# EAGLE board npa201_LPS22HB_together (EAGLE 8.2.2)
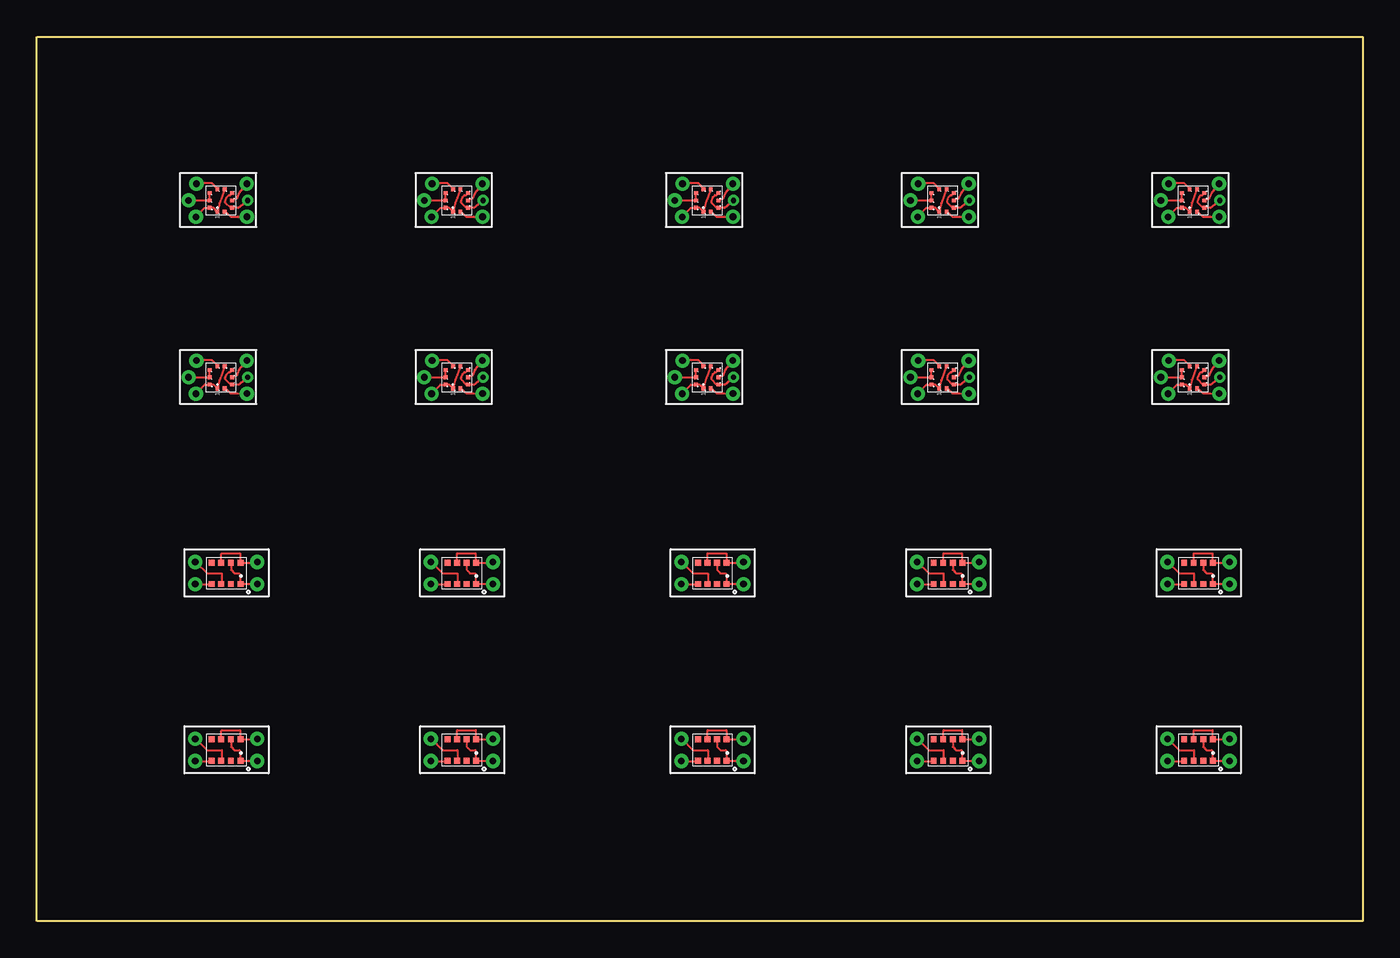
[diagram p0: board, top side]
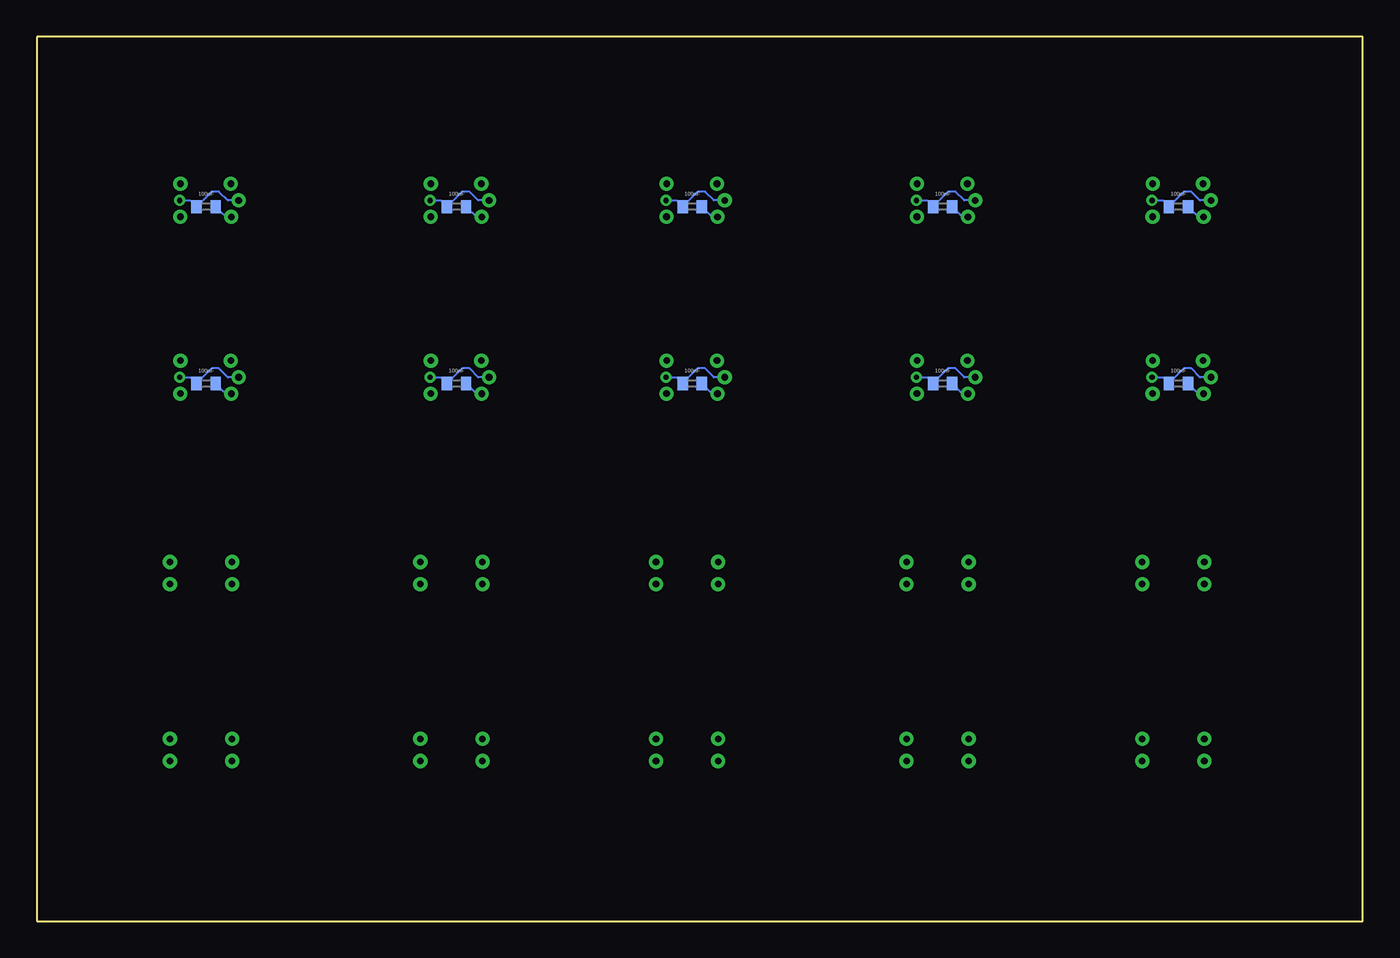
[diagram p1: board, bottom side, seen from below]

Size 90 x 60 mm. Coordinates in mm from the lower left corner, seen from the top.
Outline: 0,0 0,60 90,60 90,0 0,0
Copper layers (1*16): Top 0.035mm / dielectric 1.5mm / Bottom 0.035mm
Design rules "default *": minimum track width 6mil, minimum drill 0.35mm, track to track 6mil, track to pad 6mil, pad to pad 6mil, via to via 6mil, smd to smd 6mil, copper to edge 40mil, drill to drill 6mil, minimum pad ring 10mil, minimum via ring 8mil, stop-mask expansion 4mil, vias tented up to drill 0mil, thermal gap 10mil

## Footprints (pad centres in the part's own frame; a part is rotated, then mirrored left to right if it is on the bottom)
C0402 = smd 0.7 x 0.9: 1 -0.65,0; 2 0.65,0
AMPHENOL_NPA201 = smd 0.4 x 0.4: P$1 0.975,-0.725; P$2 0.325,-0.725; P$3 -0.325,-0.725; P$4 -0.975,-0.725; P$5 -0.975,0.725; P$6 -0.325,0.725; P$7 0.325,0.725; P$8 0.975,0.725
WIREPAD_0,8/0,45 = drill 0.45 pad 0.71: P$1 0,0
LPS22HB_HLGA = smd 0.275 x 0.25: P$1 0.762,-0.25; P$2 0.762,0.25; P$6 -0.762,0.25; P$7 -0.762,-0.25 | smd 0.25 x 0.275: P$3 0.5,0.762; P$4 0,0.762; P$5 -0.5,0.762; P$8 -0.5,-0.762; P$9 0,-0.762; P$10 0.5,-0.762

## Placement (x,y rotation side)
C1  100nF  [C0402]  28.51,36.48 180 bottom
C2  100nF  [C0402]  12.51,36.48 180 bottom
C3  100nF  [C0402]  12.51,48.48 180 bottom
C4  100nF  [C0402]  28.51,48.48 180 bottom
C5  100nF  [C0402]  45.51,36.48 180 bottom
C6  100nF  [C0402]  61.51,36.48 180 bottom
C7  100nF  [C0402]  45.51,48.48 180 bottom
C8  100nF  [C0402]  61.51,48.48 180 bottom
C9  100nF  [C0402]  78.51,36.48 180 bottom
C10  100nF  [C0402]  78.51,48.48 180 bottom
U$1  AMPHENOL_NPA201  [AMPHENOL_NPA201]  12.85,11.6 0 top
U$2  WIREPAD_0,8/0,45  [WIREPAD_0,8/0,45]  10.75,12.36 0 top
U$3  WIREPAD_0,8/0,45  [WIREPAD_0,8/0,45]  10.75,10.86 0 top
U$4  WIREPAD_0,8/0,45  [WIREPAD_0,8/0,45]  14.97,12.36 0 top
U$5  WIREPAD_0,8/0,45  [WIREPAD_0,8/0,45]  14.97,10.86 0 top
U$6  WIREPAD_0,8/0,45  [WIREPAD_0,8/0,45]  10.75,24.36 0 top
U$7  WIREPAD_0,8/0,45  [WIREPAD_0,8/0,45]  10.75,22.86 0 top
U$8  WIREPAD_0,8/0,45  [WIREPAD_0,8/0,45]  14.97,24.36 0 top
U$9  WIREPAD_0,8/0,45  [WIREPAD_0,8/0,45]  14.97,22.86 0 top
U$10  AMPHENOL_NPA201  [AMPHENOL_NPA201]  12.85,23.6 0 top
U$11  WIREPAD_0,8/0,45  [WIREPAD_0,8/0,45]  26.75,12.36 0 top
U$12  WIREPAD_0,8/0,45  [WIREPAD_0,8/0,45]  26.75,10.86 0 top
U$13  WIREPAD_0,8/0,45  [WIREPAD_0,8/0,45]  30.97,12.36 0 top
U$14  WIREPAD_0,8/0,45  [WIREPAD_0,8/0,45]  30.97,10.86 0 top
U$15  AMPHENOL_NPA201  [AMPHENOL_NPA201]  28.85,11.6 0 top
U$16  WIREPAD_0,8/0,45  [WIREPAD_0,8/0,45]  26.75,24.36 0 top
U$17  WIREPAD_0,8/0,45  [WIREPAD_0,8/0,45]  26.75,22.86 0 top
U$18  WIREPAD_0,8/0,45  [WIREPAD_0,8/0,45]  30.97,24.36 0 top
U$19  WIREPAD_0,8/0,45  [WIREPAD_0,8/0,45]  30.97,22.86 0 top
U$20  AMPHENOL_NPA201  [AMPHENOL_NPA201]  28.85,23.6 0 top
U$21  WIREPAD_0,8/0,45  [WIREPAD_0,8/0,45]  43.75,12.36 0 top
U$22  WIREPAD_0,8/0,45  [WIREPAD_0,8/0,45]  43.75,10.86 0 top
U$23  WIREPAD_0,8/0,45  [WIREPAD_0,8/0,45]  47.97,12.36 0 top
U$24  WIREPAD_0,8/0,45  [WIREPAD_0,8/0,45]  47.97,10.86 0 top
U$25  AMPHENOL_NPA201  [AMPHENOL_NPA201]  45.85,11.6 0 top
U$26  WIREPAD_0,8/0,45  [WIREPAD_0,8/0,45]  43.75,24.36 0 top
U$27  WIREPAD_0,8/0,45  [WIREPAD_0,8/0,45]  43.75,22.86 0 top
U$28  WIREPAD_0,8/0,45  [WIREPAD_0,8/0,45]  47.97,24.36 0 top
U$29  WIREPAD_0,8/0,45  [WIREPAD_0,8/0,45]  47.97,22.86 0 top
U$30  AMPHENOL_NPA201  [AMPHENOL_NPA201]  45.85,23.6 0 top
U$31  WIREPAD_0,8/0,45  [WIREPAD_0,8/0,45]  59.75,12.36 0 top
U$32  WIREPAD_0,8/0,45  [WIREPAD_0,8/0,45]  59.75,10.86 0 top
U$33  WIREPAD_0,8/0,45  [WIREPAD_0,8/0,45]  63.97,12.36 0 top
U$34  WIREPAD_0,8/0,45  [WIREPAD_0,8/0,45]  63.97,10.86 0 top
U$35  AMPHENOL_NPA201  [AMPHENOL_NPA201]  61.85,11.6 0 top
U$36  WIREPAD_0,8/0,45  [WIREPAD_0,8/0,45]  59.75,24.36 0 top
U$37  WIREPAD_0,8/0,45  [WIREPAD_0,8/0,45]  59.75,22.86 0 top
U$38  WIREPAD_0,8/0,45  [WIREPAD_0,8/0,45]  63.97,24.36 0 top
U$39  WIREPAD_0,8/0,45  [WIREPAD_0,8/0,45]  63.97,22.86 0 top
U$40  AMPHENOL_NPA201  [AMPHENOL_NPA201]  61.85,23.6 0 top
U$41  WIREPAD_0,8/0,45  [WIREPAD_0,8/0,45]  76.75,12.36 0 top
U$42  WIREPAD_0,8/0,45  [WIREPAD_0,8/0,45]  76.75,10.86 0 top
U$43  WIREPAD_0,8/0,45  [WIREPAD_0,8/0,45]  80.97,12.36 0 top
U$44  WIREPAD_0,8/0,45  [WIREPAD_0,8/0,45]  80.97,10.86 0 top
U$45  AMPHENOL_NPA201  [AMPHENOL_NPA201]  78.85,11.6 0 top
U$46  WIREPAD_0,8/0,45  [WIREPAD_0,8/0,45]  76.75,24.36 0 top
U$47  WIREPAD_0,8/0,45  [WIREPAD_0,8/0,45]  76.75,22.86 0 top
U$48  WIREPAD_0,8/0,45  [WIREPAD_0,8/0,45]  80.97,24.36 0 top
U$49  WIREPAD_0,8/0,45  [WIREPAD_0,8/0,45]  80.97,22.86 0 top
U$50  AMPHENOL_NPA201  [AMPHENOL_NPA201]  78.85,23.6 0 top
U$51  WIREPAD_0,8/0,45  [WIREPAD_0,8/0,45]  14.26,35.79 90 top
U$52  WIREPAD_0,8/0,45  [WIREPAD_0,8/0,45]  14.25,38.03 90 top
U$53  WIREPAD_0,8/0,45  [WIREPAD_0,8/0,45]  10.83,38.03 90 top
U$54  WIREPAD_0,8/0,45  [WIREPAD_0,8/0,45]  10.3,36.9 90 top
U$55  WIREPAD_0,8/0,45  [WIREPAD_0,8/0,45]  10.8,35.78 90 top
U$56  LPS22HB_HLGA  [LPS22HB_HLGA]  12.5,36.9 270 top
U$57  WIREPAD_0,8/0,45  [WIREPAD_0,8/0,45]  30.26,35.79 90 top
U$58  WIREPAD_0,8/0,45  [WIREPAD_0,8/0,45]  30.25,38.03 90 top
U$59  WIREPAD_0,8/0,45  [WIREPAD_0,8/0,45]  26.83,38.03 90 top
U$60  WIREPAD_0,8/0,45  [WIREPAD_0,8/0,45]  26.3,36.9 90 top
U$61  WIREPAD_0,8/0,45  [WIREPAD_0,8/0,45]  26.8,35.78 90 top
U$62  LPS22HB_HLGA  [LPS22HB_HLGA]  28.5,36.9 270 top
U$63  WIREPAD_0,8/0,45  [WIREPAD_0,8/0,45]  14.26,47.79 90 top
U$64  WIREPAD_0,8/0,45  [WIREPAD_0,8/0,45]  14.25,50.03 90 top
U$65  WIREPAD_0,8/0,45  [WIREPAD_0,8/0,45]  10.83,50.03 90 top
U$66  WIREPAD_0,8/0,45  [WIREPAD_0,8/0,45]  10.3,48.9 90 top
U$67  WIREPAD_0,8/0,45  [WIREPAD_0,8/0,45]  10.8,47.78 90 top
U$68  LPS22HB_HLGA  [LPS22HB_HLGA]  12.5,48.9 270 top
U$69  WIREPAD_0,8/0,45  [WIREPAD_0,8/0,45]  30.26,47.79 90 top
U$70  WIREPAD_0,8/0,45  [WIREPAD_0,8/0,45]  30.25,50.03 90 top
U$71  WIREPAD_0,8/0,45  [WIREPAD_0,8/0,45]  26.83,50.03 90 top
U$72  WIREPAD_0,8/0,45  [WIREPAD_0,8/0,45]  26.3,48.9 90 top
U$73  WIREPAD_0,8/0,45  [WIREPAD_0,8/0,45]  26.8,47.78 90 top
U$74  LPS22HB_HLGA  [LPS22HB_HLGA]  28.5,48.9 270 top
U$75  WIREPAD_0,8/0,45  [WIREPAD_0,8/0,45]  47.26,35.79 90 top
U$76  WIREPAD_0,8/0,45  [WIREPAD_0,8/0,45]  47.25,38.03 90 top
U$77  WIREPAD_0,8/0,45  [WIREPAD_0,8/0,45]  43.83,38.03 90 top
U$78  WIREPAD_0,8/0,45  [WIREPAD_0,8/0,45]  43.3,36.9 90 top
U$79  WIREPAD_0,8/0,45  [WIREPAD_0,8/0,45]  43.8,35.78 90 top
U$80  LPS22HB_HLGA  [LPS22HB_HLGA]  45.5,36.9 270 top
U$81  WIREPAD_0,8/0,45  [WIREPAD_0,8/0,45]  63.26,35.79 90 top
U$82  WIREPAD_0,8/0,45  [WIREPAD_0,8/0,45]  63.25,38.03 90 top
U$83  WIREPAD_0,8/0,45  [WIREPAD_0,8/0,45]  59.83,38.03 90 top
U$84  WIREPAD_0,8/0,45  [WIREPAD_0,8/0,45]  59.3,36.9 90 top
U$85  WIREPAD_0,8/0,45  [WIREPAD_0,8/0,45]  59.8,35.78 90 top
U$86  LPS22HB_HLGA  [LPS22HB_HLGA]  61.5,36.9 270 top
U$87  WIREPAD_0,8/0,45  [WIREPAD_0,8/0,45]  47.26,47.79 90 top
U$88  WIREPAD_0,8/0,45  [WIREPAD_0,8/0,45]  47.25,50.03 90 top
U$89  WIREPAD_0,8/0,45  [WIREPAD_0,8/0,45]  43.83,50.03 90 top
U$90  WIREPAD_0,8/0,45  [WIREPAD_0,8/0,45]  43.3,48.9 90 top
U$91  WIREPAD_0,8/0,45  [WIREPAD_0,8/0,45]  43.8,47.78 90 top
U$92  LPS22HB_HLGA  [LPS22HB_HLGA]  45.5,48.9 270 top
U$93  WIREPAD_0,8/0,45  [WIREPAD_0,8/0,45]  63.26,47.79 90 top
U$94  WIREPAD_0,8/0,45  [WIREPAD_0,8/0,45]  63.25,50.03 90 top
U$95  WIREPAD_0,8/0,45  [WIREPAD_0,8/0,45]  59.83,50.03 90 top
U$96  WIREPAD_0,8/0,45  [WIREPAD_0,8/0,45]  59.3,48.9 90 top
U$97  WIREPAD_0,8/0,45  [WIREPAD_0,8/0,45]  59.8,47.78 90 top
U$98  LPS22HB_HLGA  [LPS22HB_HLGA]  61.5,48.9 270 top
U$99  WIREPAD_0,8/0,45  [WIREPAD_0,8/0,45]  80.26,35.79 90 top
U$100  WIREPAD_0,8/0,45  [WIREPAD_0,8/0,45]  80.25,38.03 90 top
U$101  WIREPAD_0,8/0,45  [WIREPAD_0,8/0,45]  76.83,38.03 90 top
U$102  WIREPAD_0,8/0,45  [WIREPAD_0,8/0,45]  76.3,36.9 90 top
U$103  WIREPAD_0,8/0,45  [WIREPAD_0,8/0,45]  76.8,35.78 90 top
U$104  LPS22HB_HLGA  [LPS22HB_HLGA]  78.5,36.9 270 top
U$105  WIREPAD_0,8/0,45  [WIREPAD_0,8/0,45]  80.26,47.79 90 top
U$106  WIREPAD_0,8/0,45  [WIREPAD_0,8/0,45]  80.25,50.03 90 top
U$107  WIREPAD_0,8/0,45  [WIREPAD_0,8/0,45]  76.83,50.03 90 top
U$108  WIREPAD_0,8/0,45  [WIREPAD_0,8/0,45]  76.3,48.9 90 top
U$109  WIREPAD_0,8/0,45  [WIREPAD_0,8/0,45]  76.8,47.78 90 top
U$110  LPS22HB_HLGA  [LPS22HB_HLGA]  78.5,48.9 270 top

## Library data of the parts
C1-C10 = resistor
U$1 U$10 U$15 U$20 U$25 U$30 U$35 U$40 U$45 U$50 = Amphenol_NPA201
U$2-U$9 U$11-U$14 U$16-U$19 U$21-U$24 U$26-U$29 U$31-U$34 U$36-U$39 U$41-U$44 U$46-U$49 U$51-U$55 U$57-U$61 U$63-U$67 U$69-U$73 U$75-U$79 U$81-U$85 U$87-U$91 U$93-U$97 U$99-U$103 U$105-U$109 = wirepad_08-045
U$56 U$62 U$68 U$74 U$80 U$86 U$92 U$98 U$104 U$110 = LPS22HB

## Nets
+3V1: U$8.P$1 U$10.P$6 U$10.P$8
+3V2: U$13.P$1 U$15.P$6 U$15.P$8
+3V3: U$1.P$6 U$1.P$8 U$4.P$1
+3V4: U$18.P$1 U$20.P$6 U$20.P$8
+3V5: U$23.P$1 U$25.P$6 U$25.P$8
+3V6: U$28.P$1 U$30.P$6 U$30.P$8
+3V7: U$33.P$1 U$35.P$6 U$35.P$8
+3V8: U$38.P$1 U$40.P$6 U$40.P$8
+3V9: U$43.P$1 U$45.P$6 U$45.P$8
+3V10: U$48.P$1 U$50.P$6 U$50.P$8
+3V11: C2.1 U$55.P$1 U$56.P$1 U$56.P$6 U$56.P$10
+3V12: C1.1 U$61.P$1 U$62.P$1 U$62.P$6 U$62.P$10
+3V13: C3.1 U$67.P$1 U$68.P$1 U$68.P$6 U$68.P$10
+3V14: C4.1 U$73.P$1 U$74.P$1 U$74.P$6 U$74.P$10
+3V15: C5.1 U$79.P$1 U$80.P$1 U$80.P$6 U$80.P$10
+3V16: C6.1 U$85.P$1 U$86.P$1 U$86.P$6 U$86.P$10
+3V17: C7.1 U$91.P$1 U$92.P$1 U$92.P$6 U$92.P$10
+3V18: C8.1 U$97.P$1 U$98.P$1 U$98.P$6 U$98.P$10
+3V19: C9.1 U$103.P$1 U$104.P$1 U$104.P$6 U$104.P$10
+3V20: C10.1 U$109.P$1 U$110.P$1 U$110.P$6 U$110.P$10
GND: U$1.P$1 U$1.P$7 U$5.P$1
GND1: U$9.P$1 U$10.P$1 U$10.P$7
GND2: U$14.P$1 U$15.P$1 U$15.P$7
GND3: U$19.P$1 U$20.P$1 U$20.P$7
GND4: U$24.P$1 U$25.P$1 U$25.P$7
GND5: U$29.P$1 U$30.P$1 U$30.P$7
GND6: U$34.P$1 U$35.P$1 U$35.P$7
GND7: U$39.P$1 U$40.P$1 U$40.P$7
GND8: U$44.P$1 U$45.P$1 U$45.P$7
GND9: U$49.P$1 U$50.P$1 U$50.P$7
GND10: C2.2 U$54.P$1 U$56.P$3 U$56.P$5 U$56.P$8 U$56.P$9
GND11: C1.2 U$60.P$1 U$62.P$3 U$62.P$5 U$62.P$8 U$62.P$9
GND12: C3.2 U$66.P$1 U$68.P$3 U$68.P$5 U$68.P$8 U$68.P$9
GND13: C4.2 U$72.P$1 U$74.P$3 U$74.P$5 U$74.P$8 U$74.P$9
GND14: C5.2 U$78.P$1 U$80.P$3 U$80.P$5 U$80.P$8 U$80.P$9
GND15: C6.2 U$84.P$1 U$86.P$3 U$86.P$5 U$86.P$8 U$86.P$9
GND16: C7.2 U$90.P$1 U$92.P$3 U$92.P$5 U$92.P$8 U$92.P$9
GND17: C8.2 U$96.P$1 U$98.P$3 U$98.P$5 U$98.P$8 U$98.P$9
GND18: C9.2 U$102.P$1 U$104.P$3 U$104.P$5 U$104.P$8 U$104.P$9
GND19: C10.2 U$108.P$1 U$110.P$3 U$110.P$5 U$110.P$8 U$110.P$9
N$1: U$1.P$3 U$2.P$1
N$2: U$1.P$4 U$3.P$1
N$3: U$6.P$1 U$10.P$3
N$4: U$7.P$1 U$10.P$4
N$5: U$11.P$1 U$15.P$3
N$6: U$12.P$1 U$15.P$4
N$7: U$16.P$1 U$20.P$3
N$8: U$17.P$1 U$20.P$4
N$9: U$21.P$1 U$25.P$3
N$10: U$22.P$1 U$25.P$4
N$11: U$26.P$1 U$30.P$3
N$12: U$27.P$1 U$30.P$4
N$13: U$31.P$1 U$35.P$3
N$14: U$32.P$1 U$35.P$4
N$15: U$36.P$1 U$40.P$3
N$16: U$37.P$1 U$40.P$4
N$17: U$41.P$1 U$45.P$3
N$18: U$42.P$1 U$45.P$4
N$19: U$46.P$1 U$50.P$3
N$20: U$47.P$1 U$50.P$4
N$21: U$52.P$1 U$56.P$4
N$22: U$51.P$1 U$56.P$2
N$23: U$53.P$1 U$56.P$7
N$24: U$58.P$1 U$62.P$4
N$25: U$57.P$1 U$62.P$2
N$26: U$59.P$1 U$62.P$7
N$27: U$64.P$1 U$68.P$4
N$28: U$63.P$1 U$68.P$2
N$29: U$65.P$1 U$68.P$7
N$30: U$70.P$1 U$74.P$4
N$31: U$69.P$1 U$74.P$2
N$32: U$71.P$1 U$74.P$7
N$33: U$76.P$1 U$80.P$4
N$34: U$75.P$1 U$80.P$2
N$35: U$77.P$1 U$80.P$7
N$36: U$82.P$1 U$86.P$4
N$37: U$81.P$1 U$86.P$2
N$38: U$83.P$1 U$86.P$7
N$39: U$88.P$1 U$92.P$4
N$40: U$87.P$1 U$92.P$2
N$41: U$89.P$1 U$92.P$7
N$42: U$94.P$1 U$98.P$4
N$43: U$93.P$1 U$98.P$2
N$44: U$95.P$1 U$98.P$7
N$45: U$100.P$1 U$104.P$4
N$46: U$99.P$1 U$104.P$2
N$47: U$101.P$1 U$104.P$7
N$48: U$106.P$1 U$110.P$4
N$49: U$105.P$1 U$110.P$2
N$50: U$107.P$1 U$110.P$7

## Tracks (layer width: path | path; a pad name or v marks a point on that pad's centre or on a via)
+3V1
  Top 0.152: U$10.P$6 12.53,24.93 12.55,24.95 13.8,24.95 13.8,24.35 U$10.P$8 14.93,24.32 U$8.P$1
+3V2
  Top 0.152: U$15.P$6 28.52,12.93 28.55,12.95 29.8,12.95 29.8,12.35 U$15.P$8 30.93,12.32 U$13.P$1
+3V3
  Top 0.152: U$1.P$6 12.53,12.93 12.55,12.95 13.8,12.95 13.8,12.35 U$1.P$8 14.93,12.32 U$4.P$1
+3V4
  Top 0.152: U$20.P$6 28.52,24.93 28.55,24.95 29.8,24.95 29.8,24.35 U$20.P$8 30.93,24.32 U$18.P$1
+3V5
  Top 0.152: U$25.P$6 45.52,12.93 45.55,12.95 46.8,12.95 46.8,12.35 U$25.P$8 47.93,12.32 U$23.P$1
+3V6
  Top 0.152: U$30.P$6 45.52,24.93 45.55,24.95 46.8,24.95 46.8,24.35 U$30.P$8 47.93,24.32 U$28.P$1
+3V7
  Top 0.152: U$35.P$6 61.52,12.93 61.55,12.95 62.8,12.95 62.8,12.35 U$35.P$8 63.93,12.32 U$33.P$1
+3V8
  Top 0.152: U$40.P$6 61.52,24.93 61.55,24.95 62.8,24.95 62.8,24.35 U$40.P$8 63.93,24.32 U$38.P$1
+3V9
  Top 0.152: U$45.P$6 78.53,12.93 78.55,12.95 79.8,12.95 79.8,12.35 U$45.P$8 80.93,12.32 U$43.P$1
+3V10
  Top 0.152: U$50.P$6 78.53,24.93 78.55,24.95 79.8,24.95 79.8,24.35 U$50.P$8 80.93,24.32 U$48.P$1
+3V11
  Top 0.152: U$56.P$10 11.99,36.4 11.99,36.39 | 11.99,36.39 U$56.P$10 | 11.99,36.39 U$56.P$1 12.4,36.71 U$56.P$6 | U$56.P$10 11.4,36.4 U$55.P$1
  Bottom 0.152: U$55.P$1 11.16,35.78 C2.1
+3V12
  Top 0.152: U$62.P$10 27.99,36.4 28,36.39 | 28,36.39 U$62.P$10 | 28,36.39 U$62.P$1 28.4,36.71 U$62.P$6 | U$62.P$10 27.4,36.4 U$61.P$1
  Bottom 0.152: U$61.P$1 27.16,35.78 C1.1
+3V13
  Top 0.152: U$68.P$10 11.99,48.4 11.99,48.39 | 11.99,48.39 U$68.P$10 | 11.99,48.39 U$68.P$1 12.4,48.71 U$68.P$6 | U$68.P$10 11.4,48.4 U$67.P$1
  Bottom 0.152: U$67.P$1 11.16,47.78 C3.1
+3V14
  Top 0.152: U$74.P$10 27.99,48.4 28,48.39 | 28,48.39 U$74.P$10 | 28,48.39 U$74.P$1 28.4,48.71 U$74.P$6 | U$74.P$10 27.4,48.4 U$73.P$1
  Bottom 0.152: U$73.P$1 27.16,47.78 C4.1
+3V15
  Top 0.152: U$80.P$10 44.99,36.4 44.99,36.39 | 44.99,36.39 U$80.P$10 | 44.99,36.39 U$80.P$1 45.4,36.71 U$80.P$6 | U$80.P$10 44.4,36.4 U$79.P$1
  Bottom 0.152: U$79.P$1 44.16,35.78 C5.1
+3V16
  Top 0.152: U$86.P$10 60.99,36.4 60.99,36.39 | 60.99,36.39 U$86.P$10 | 60.99,36.39 U$86.P$1 61.4,36.71 U$86.P$6 | U$86.P$10 60.4,36.4 U$85.P$1
  Bottom 0.152: U$85.P$1 60.16,35.78 C6.1
+3V17
  Top 0.152: U$92.P$10 44.99,48.4 44.99,48.39 | 44.99,48.39 U$92.P$10 | 44.99,48.39 U$92.P$1 45.4,48.71 U$92.P$6 | U$92.P$10 44.4,48.4 U$91.P$1
  Bottom 0.152: U$91.P$1 44.16,47.78 C7.1
+3V18
  Top 0.152: U$98.P$10 60.99,48.4 60.99,48.39 | 60.99,48.39 U$98.P$10 | 60.99,48.39 U$98.P$1 61.4,48.71 U$98.P$6 | U$98.P$10 60.4,48.4 U$97.P$1
  Bottom 0.152: U$97.P$1 60.16,47.78 C8.1
+3V19
  Top 0.152: U$104.P$10 77.99,36.4 78,36.39 | 78,36.39 U$104.P$10 | 78,36.39 U$104.P$1 78.4,36.71 U$104.P$6 | U$104.P$10 77.4,36.4 U$103.P$1
  Bottom 0.152: U$103.P$1 77.17,35.78 C9.1
+3V20
  Top 0.152: U$110.P$10 77.99,48.4 78,48.39 | 78,48.39 U$110.P$10 | 78,48.39 U$110.P$1 78.4,48.71 U$110.P$6 | U$110.P$10 77.4,48.4 U$109.P$1
  Bottom 0.152: U$109.P$1 77.17,47.78 C10.1
GND
  Top 0.152: U$1.P$7 13.18,11.82 13.4,11.6 13.75,11.6 13.8,11.55 13.8,10.9 U$1.P$1 14.95,10.88 U$5.P$1
GND1
  Top 0.152: U$10.P$7 13.18,23.82 13.4,23.6 13.75,23.6 13.8,23.55 13.8,22.9 U$10.P$1 14.95,22.88 U$9.P$1
GND2
  Top 0.152: U$15.P$7 29.18,11.82 29.4,11.6 29.75,11.6 29.8,11.55 29.8,10.9 U$15.P$1 30.95,10.88 U$14.P$1
GND3
  Top 0.152: U$20.P$7 29.18,23.82 29.4,23.6 29.75,23.6 29.8,23.55 29.8,22.9 U$20.P$1 30.95,22.88 U$19.P$1
GND4
  Top 0.152: U$25.P$7 46.17,11.82 46.4,11.6 46.75,11.6 46.8,11.55 46.8,10.9 U$25.P$1 47.95,10.88 U$24.P$1
GND5
  Top 0.152: U$30.P$7 46.17,23.82 46.4,23.6 46.75,23.6 46.8,23.55 46.8,22.9 U$30.P$1 47.95,22.88 U$29.P$1
GND6
  Top 0.152: U$35.P$7 62.17,11.82 62.4,11.6 62.75,11.6 62.8,11.55 62.8,10.9 U$35.P$1 63.95,10.88 U$34.P$1
GND7
  Top 0.152: U$40.P$7 62.17,23.82 62.4,23.6 62.75,23.6 62.8,23.55 62.8,22.9 U$40.P$1 63.95,22.88 U$39.P$1
GND8
  Top 0.152: U$45.P$7 79.17,11.82 79.4,11.6 79.75,11.6 79.8,11.55 79.8,10.9 U$45.P$1 80.95,10.88 U$44.P$1
GND9
  Top 0.152: U$50.P$7 79.17,23.82 79.4,23.6 79.75,23.6 79.8,23.55 79.8,22.9 U$50.P$1 80.95,22.88 U$49.P$1
GND10  (via drill 0.35)
  Top 0.152: U$56.P$8 U$56.P$9 U$54.P$1 | v14.3,36.9 13.66,36.4 U$56.P$3 13.15,36.4 12.8,36.75 12.8,36.86 12.9,37.12 13.03,37.25 13.12,37.25 U$56.P$5
  Bottom 0.152: 10.75,36.9 U$54.P$1 11.04,36.9 11.64,37.5 12.14,37.5 C2.2 13.58,36.9 v14.3,36.9
GND11  (via drill 0.35)
  Top 0.152: U$62.P$8 U$62.P$9 U$60.P$1 | v30.3,36.9 29.66,36.4 U$62.P$3 29.15,36.4 28.8,36.75 28.8,36.86 28.9,37.12 29.03,37.25 29.12,37.25 U$62.P$5
  Bottom 0.152: 26.75,36.9 U$60.P$1 27.04,36.9 27.64,37.5 28.14,37.5 C1.2 29.58,36.9 v30.3,36.9
GND12  (via drill 0.35)
  Top 0.152: U$68.P$8 U$68.P$9 U$66.P$1 | v14.3,48.9 13.66,48.4 U$68.P$3 13.15,48.4 12.8,48.75 12.8,48.86 12.9,49.12 13.03,49.25 13.12,49.25 U$68.P$5
  Bottom 0.152: 10.75,48.9 U$66.P$1 11.04,48.9 11.64,49.5 12.14,49.5 C3.2 13.58,48.9 v14.3,48.9
GND13  (via drill 0.35)
  Top 0.152: U$74.P$8 U$74.P$9 U$72.P$1 | v30.3,48.9 29.66,48.4 U$74.P$3 29.15,48.4 28.8,48.75 28.8,48.86 28.9,49.12 29.03,49.25 29.12,49.25 U$74.P$5
  Bottom 0.152: 26.75,48.9 U$72.P$1 27.04,48.9 27.64,49.5 28.14,49.5 C4.2 29.58,48.9 v30.3,48.9
GND14  (via drill 0.35)
  Top 0.152: U$80.P$8 U$80.P$9 U$78.P$1 | v47.3,36.9 46.66,36.4 U$80.P$3 46.15,36.4 45.8,36.75 45.8,36.86 45.9,37.12 46.03,37.25 46.12,37.25 U$80.P$5
  Bottom 0.152: 43.75,36.9 U$78.P$1 44.04,36.9 44.64,37.5 45.14,37.5 C5.2 46.58,36.9 v47.3,36.9
GND15  (via drill 0.35)
  Top 0.152: U$86.P$8 U$86.P$9 U$84.P$1 | v63.3,36.9 62.66,36.4 U$86.P$3 62.15,36.4 61.8,36.75 61.8,36.86 61.9,37.12 62.03,37.25 62.12,37.25 U$86.P$5
  Bottom 0.152: 59.75,36.9 U$84.P$1 60.04,36.9 60.64,37.5 61.14,37.5 C6.2 62.58,36.9 v63.3,36.9
GND16  (via drill 0.35)
  Top 0.152: U$92.P$8 U$92.P$9 U$90.P$1 | v47.3,48.9 46.66,48.4 U$92.P$3 46.15,48.4 45.8,48.75 45.8,48.86 45.9,49.12 46.03,49.25 46.12,49.25 U$92.P$5
  Bottom 0.152: 43.75,48.9 U$90.P$1 44.04,48.9 44.64,49.5 45.14,49.5 C7.2 46.58,48.9 v47.3,48.9
GND17  (via drill 0.35)
  Top 0.152: U$98.P$8 U$98.P$9 U$96.P$1 | v63.3,48.9 62.66,48.4 U$98.P$3 62.15,48.4 61.8,48.75 61.8,48.86 61.9,49.12 62.03,49.25 62.12,49.25 U$98.P$5
  Bottom 0.152: 59.75,48.9 U$96.P$1 60.04,48.9 60.64,49.5 61.14,49.5 C8.2 62.58,48.9 v63.3,48.9
GND18  (via drill 0.35)
  Top 0.152: U$104.P$8 U$104.P$9 U$102.P$1 | v80.3,36.9 79.66,36.4 U$104.P$3 79.15,36.4 78.8,36.75 78.8,36.86 78.9,37.12 79.03,37.25 79.12,37.25 U$104.P$5
  Bottom 0.152: 76.75,36.9 U$102.P$1 77.04,36.9 77.64,37.5 78.14,37.5 C9.2 79.58,36.9 v80.3,36.9
GND19  (via drill 0.35)
  Top 0.152: U$110.P$8 U$110.P$9 U$108.P$1 | v80.3,48.9 79.66,48.4 U$110.P$3 79.15,48.4 78.8,48.75 78.8,48.86 78.9,49.12 79.03,49.25 79.12,49.25 U$110.P$5
  Bottom 0.152: 76.75,48.9 U$108.P$1 77.04,48.9 77.64,49.5 78.14,49.5 C10.2 79.58,48.9 v80.3,48.9
N$1
  Top 0.152: U$2.P$1 10.79,12.36 11.55,11.6 12.55,11.6 12.55,10.9 U$1.P$3
N$2
  Top 0.152: U$3.P$1 11.86,10.86 U$1.P$4
N$3
  Top 0.152: U$6.P$1 10.79,24.36 11.55,23.6 12.55,23.6 12.55,22.9 U$10.P$3
N$4
  Top 0.152: U$7.P$1 11.86,22.86 U$10.P$4
N$5
  Top 0.152: U$11.P$1 26.79,12.36 27.55,11.6 28.55,11.6 28.55,10.9 U$15.P$3
N$6
  Top 0.152: U$12.P$1 27.86,10.86 U$15.P$4
N$7
  Top 0.152: U$16.P$1 26.79,24.36 27.55,23.6 28.55,23.6 28.55,22.9 U$20.P$3
N$8
  Top 0.152: U$17.P$1 27.86,22.86 U$20.P$4
N$9
  Top 0.152: U$21.P$1 43.79,12.36 44.55,11.6 45.55,11.6 45.55,10.9 U$25.P$3
N$10
  Top 0.152: U$22.P$1 44.86,10.86 U$25.P$4
N$11
  Top 0.152: U$26.P$1 43.79,24.36 44.55,23.6 45.55,23.6 45.55,22.9 U$30.P$3
N$12
  Top 0.152: U$27.P$1 44.86,22.86 U$30.P$4
N$13
  Top 0.152: U$31.P$1 59.79,12.36 60.55,11.6 61.55,11.6 61.55,10.9 U$35.P$3
N$14
  Top 0.152: U$32.P$1 60.86,10.86 U$35.P$4
N$15
  Top 0.152: U$36.P$1 59.79,24.36 60.55,23.6 61.55,23.6 61.55,22.9 U$40.P$3
N$16
  Top 0.152: U$37.P$1 60.86,22.86 U$40.P$4
N$17
  Top 0.152: U$41.P$1 76.79,12.36 77.55,11.6 78.55,11.6 78.55,10.9 U$45.P$3
N$18
  Top 0.152: U$42.P$1 77.86,10.86 U$45.P$4
N$19
  Top 0.152: U$46.P$1 76.79,24.36 77.55,23.6 78.55,23.6 78.55,22.9 U$50.P$3
N$20
  Top 0.152: U$47.P$1 77.86,22.86 U$50.P$4
N$21
  Top 0.152: U$52.P$1 13.75,37.4 13.6,37.05 U$56.P$4
N$22
  Top 0.152: U$56.P$2 12.81,36.14 13.15,35.8 13.65,35.8 U$51.P$1
N$23
  Top 0.152: U$56.P$7 12.25,37.7 11.9,38.05 10.95,38.05 U$53.P$1
N$24
  Top 0.152: U$58.P$1 29.75,37.4 29.6,37.05 U$62.P$4
N$25
  Top 0.152: U$62.P$2 28.81,36.14 29.15,35.8 29.65,35.8 U$57.P$1
N$26
  Top 0.152: U$62.P$7 28.25,37.7 27.9,38.05 26.95,38.05 U$59.P$1
N$27
  Top 0.152: U$64.P$1 13.75,49.4 13.6,49.05 U$68.P$4
N$28
  Top 0.152: U$68.P$2 12.81,48.14 13.15,47.8 13.65,47.8 U$63.P$1
N$29
  Top 0.152: U$68.P$7 12.25,49.7 11.9,50.05 10.95,50.05 U$65.P$1
N$30
  Top 0.152: U$70.P$1 29.75,49.4 29.6,49.05 U$74.P$4
N$31
  Top 0.152: U$74.P$2 28.81,48.14 29.15,47.8 29.65,47.8 U$69.P$1
N$32
  Top 0.152: U$74.P$7 28.25,49.7 27.9,50.05 26.95,50.05 U$71.P$1
N$33
  Top 0.152: U$76.P$1 46.75,37.4 46.6,37.05 U$80.P$4
N$34
  Top 0.152: U$80.P$2 45.81,36.14 46.15,35.8 46.65,35.8 U$75.P$1
N$35
  Top 0.152: U$80.P$7 45.25,37.7 44.9,38.05 43.95,38.05 U$77.P$1
N$36
  Top 0.152: U$82.P$1 62.75,37.4 62.6,37.05 U$86.P$4
N$37
  Top 0.152: U$86.P$2 61.81,36.14 62.15,35.8 62.65,35.8 U$81.P$1
N$38
  Top 0.152: U$86.P$7 61.25,37.7 60.9,38.05 59.95,38.05 U$83.P$1
N$39
  Top 0.152: U$88.P$1 46.75,49.4 46.6,49.05 U$92.P$4
N$40
  Top 0.152: U$92.P$2 45.81,48.14 46.15,47.8 46.65,47.8 U$87.P$1
N$41
  Top 0.152: U$92.P$7 45.25,49.7 44.9,50.05 43.95,50.05 U$89.P$1
N$42
  Top 0.152: U$94.P$1 62.75,49.4 62.6,49.05 U$98.P$4
N$43
  Top 0.152: U$98.P$2 61.81,48.14 62.15,47.8 62.65,47.8 U$93.P$1
N$44
  Top 0.152: U$98.P$7 61.25,49.7 60.9,50.05 59.95,50.05 U$95.P$1
N$45
  Top 0.152: U$100.P$1 79.75,37.4 79.6,37.05 U$104.P$4
N$46
  Top 0.152: U$104.P$2 78.81,36.14 79.15,35.8 79.65,35.8 U$99.P$1
N$47
  Top 0.152: U$104.P$7 78.25,37.7 77.9,38.05 76.95,38.05 U$101.P$1
N$48
  Top 0.152: U$106.P$1 79.75,49.4 79.6,49.05 U$110.P$4
N$49
  Top 0.152: U$110.P$2 78.81,48.14 79.15,47.8 79.65,47.8 U$105.P$1
N$50
  Top 0.152: U$110.P$7 78.25,49.7 77.9,50.05 76.95,50.05 U$107.P$1

## Text on the board
bPlace: 100nF | 100nF | 100nF | 100nF | 100nF | 100nF | 100nF | 100nF | 100nF | 100nF